# EAGLE board plc-interface (EAGLE 6.6.0)

Size 160 x 100 mm. Coordinates in mm from the lower left corner, seen from the top.
Outline: 0,0 160,0 160,100 0,100 0,0
Copper layers (1*16): Top 0.035mm / dielectric 1.5mm / Bottom 0.035mm
Design rules "default": minimum track width 10mil, minimum drill 24mil, track to track 8mil, track to pad 8mil, pad to pad 8mil, via to via 8mil, smd to smd 8mil, copper to edge 40mil, drill to drill 8mil, minimum pad ring 10mil, minimum via ring 8mil, stop-mask expansion 4mil, vias tented up to drill 0mil, thermal gap 10mil

## Footprints (pad centres in the part's own frame; a part is rotated, then mirrored left to right if it is on the bottom)
1,6/0,8 = drill 0.813 pad 1.6 octagon: 1 0,0
DIL06 = drill 0.813 offset: 1 -2.54,-3.81; 2 0,-3.81; 3 2.54,-3.81; 4 2.54,3.81; 5 0,3.81; 6 -2.54,3.81
0207/10 = drill 0.813 octagon: 1 -5.08,0; 2 5.08,0

## Placement (x,y rotation side)
A1  [1,6/0,8]  -63.5,-186.69 0 top  (outside the outline)
A2  [1,6/0,8]  -63.5,-201.93 0 top  (outside the outline)
A3  [1,6/0,8]  -63.5,-236.22 0 top  (outside the outline)
D1  [1,6/0,8]  -17.78,-66.04 0 top  (outside the outline)
D2  [1,6/0,8]  -17.78,-69.85 0 top  (outside the outline)
D3  [1,6/0,8]  -63.5,-152.4 0 top  (outside the outline)
D4  [1,6/0,8]  -63.5,-156.21 0 top  (outside the outline)
OK1  CNY17F  [DIL06]  -25.4,-120.65 0 top  (outside the outline)
OK2  CNY17F  [DIL06]  -36.83,-120.65 0 top  (outside the outline)
OK3  CNY17F  [DIL06]  -48.26,-120.65 0 top  (outside the outline)
OK4  CNY17F  [DIL06]  -59.69,-120.65 0 top  (outside the outline)
R1  2k4  [0207/10]  -58.42,-132.08 0 top  (outside the outline)
R2  2k4  [0207/10]  -58.42,-137.16 0 top  (outside the outline)
R3  10k  [0207/10]  -13.97,-45.72 0 top  (outside the outline)
R4  10k  [0207/10]  -58.42,-226.06 0 top  (outside the outline)
R5  10k  [0207/10]  -58.42,-231.14 0 top  (outside the outline)
R7  2k4  [0207/10]  -58.42,-142.24 0 top  (outside the outline)
R8  2k4  [0207/10]  -58.42,-147.32 0 top  (outside the outline)
R9  10k  [0207/10]  -58.42,-161.29 0 top  (outside the outline)
R10  10k  [0207/10]  -58.42,-166.37 0 top  (outside the outline)
R11  10k  [0207/10]  -58.42,-171.45 0 top  (outside the outline)
R12  10k  [0207/10]  -58.42,-176.53 0 top  (outside the outline)
R13  10k  [0207/10]  -58.42,-181.61 0 top  (outside the outline)
R14  10k  [0207/10]  -58.42,-191.77 0 top  (outside the outline)
R15  10k  [0207/10]  -58.42,-196.85 0 top  (outside the outline)
X0  [1,6/0,8]  -17.78,-96.52 0 top  (outside the outline)
X1  [1,6/0,8]  -63.5,-205.74 0 top  (outside the outline)
X2  [1,6/0,8]  -63.5,-209.55 0 top  (outside the outline)
X3  [1,6/0,8]  -63.5,-213.36 0 top  (outside the outline)
X4  [1,6/0,8]  -63.5,-217.17 0 top  (outside the outline)
X5  [1,6/0,8]  -63.5,-220.98 0 top  (outside the outline)
X6  [1,6/0,8]  -63.5,-240.03 0 top  (outside the outline)

## Library data of the parts
A1-A3 D1-D4 X0 X1-X6 = wirepad
OK1-OK4 = optocoupler; MF: VISHAY/TELEFUNKEN; MPN: CNY17F-3; OC_FARNELL: 1469473; OC_NEWARK: 58K0172
R1-R5 R7-R15 = rcl

## Nets
+5V: R3.2 R9.2 R10.2 R11.2
GND: OK1.2 OK1.4 OK2.2 OK2.4 OK3.2 OK3.4 OK4.2 OK4.4 R5.1 R13.1
N$1: OK1.1 R8.1
N$2: OK2.1
N$3: R2.1
N$4: OK4.1 R1.1
N$5: D1.1
N$6: D2.1 R7.2
N$7: D3.1 R2.2
N$8: D4.1 R1.2
N$9: OK1.5 R3.1 X0.1
N$10: OK2.5 R9.1 X1.1
N$11: OK3.5 X2.1
N$12: OK4.5 R11.1 X3.1
N$13: R12.1 R13.2 X4.1
N$14: A1.1 R12.2
N$15: R14.1 R15.2 X5.1
N$16: A2.1 R14.2
N$17: R4.1 R5.2 X6.1
N$18: A3.1 R4.2

## Tracks (layer width: path | path; a pad name or v marks a point on that pad's centre or on a via)
+5V  (3 unrouted)
GND  (9 unrouted)
N$1  (1 unrouted)
N$4  (1 unrouted)
N$6  (1 unrouted)
N$7  (1 unrouted)
N$8  (1 unrouted)
N$9  (2 unrouted)
N$10  (2 unrouted)
N$11  (1 unrouted)
N$12  (2 unrouted)
N$13  (2 unrouted)
N$14  (1 unrouted)
N$15  (2 unrouted)
N$16  (1 unrouted)
N$17  (2 unrouted)
N$18  (1 unrouted)